# EAGLE board X04B-005-B (EAGLE 6.3)
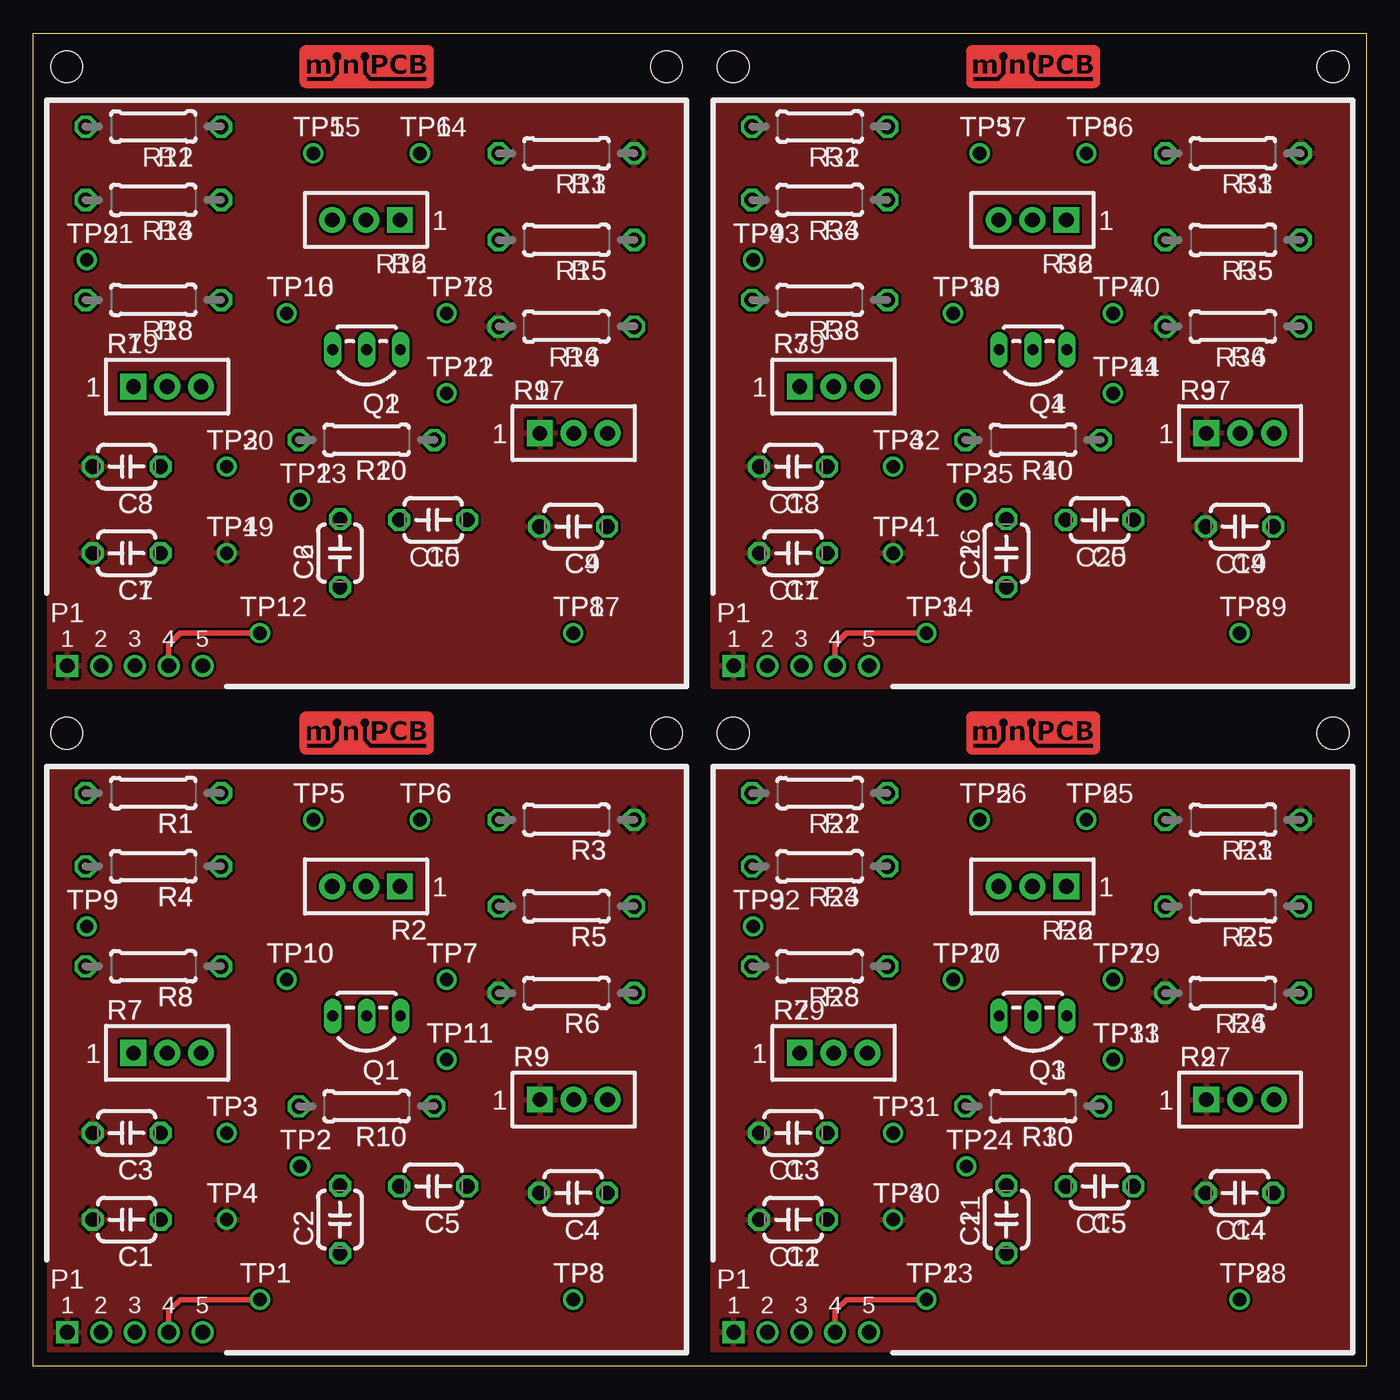
[diagram p0: board, top side]
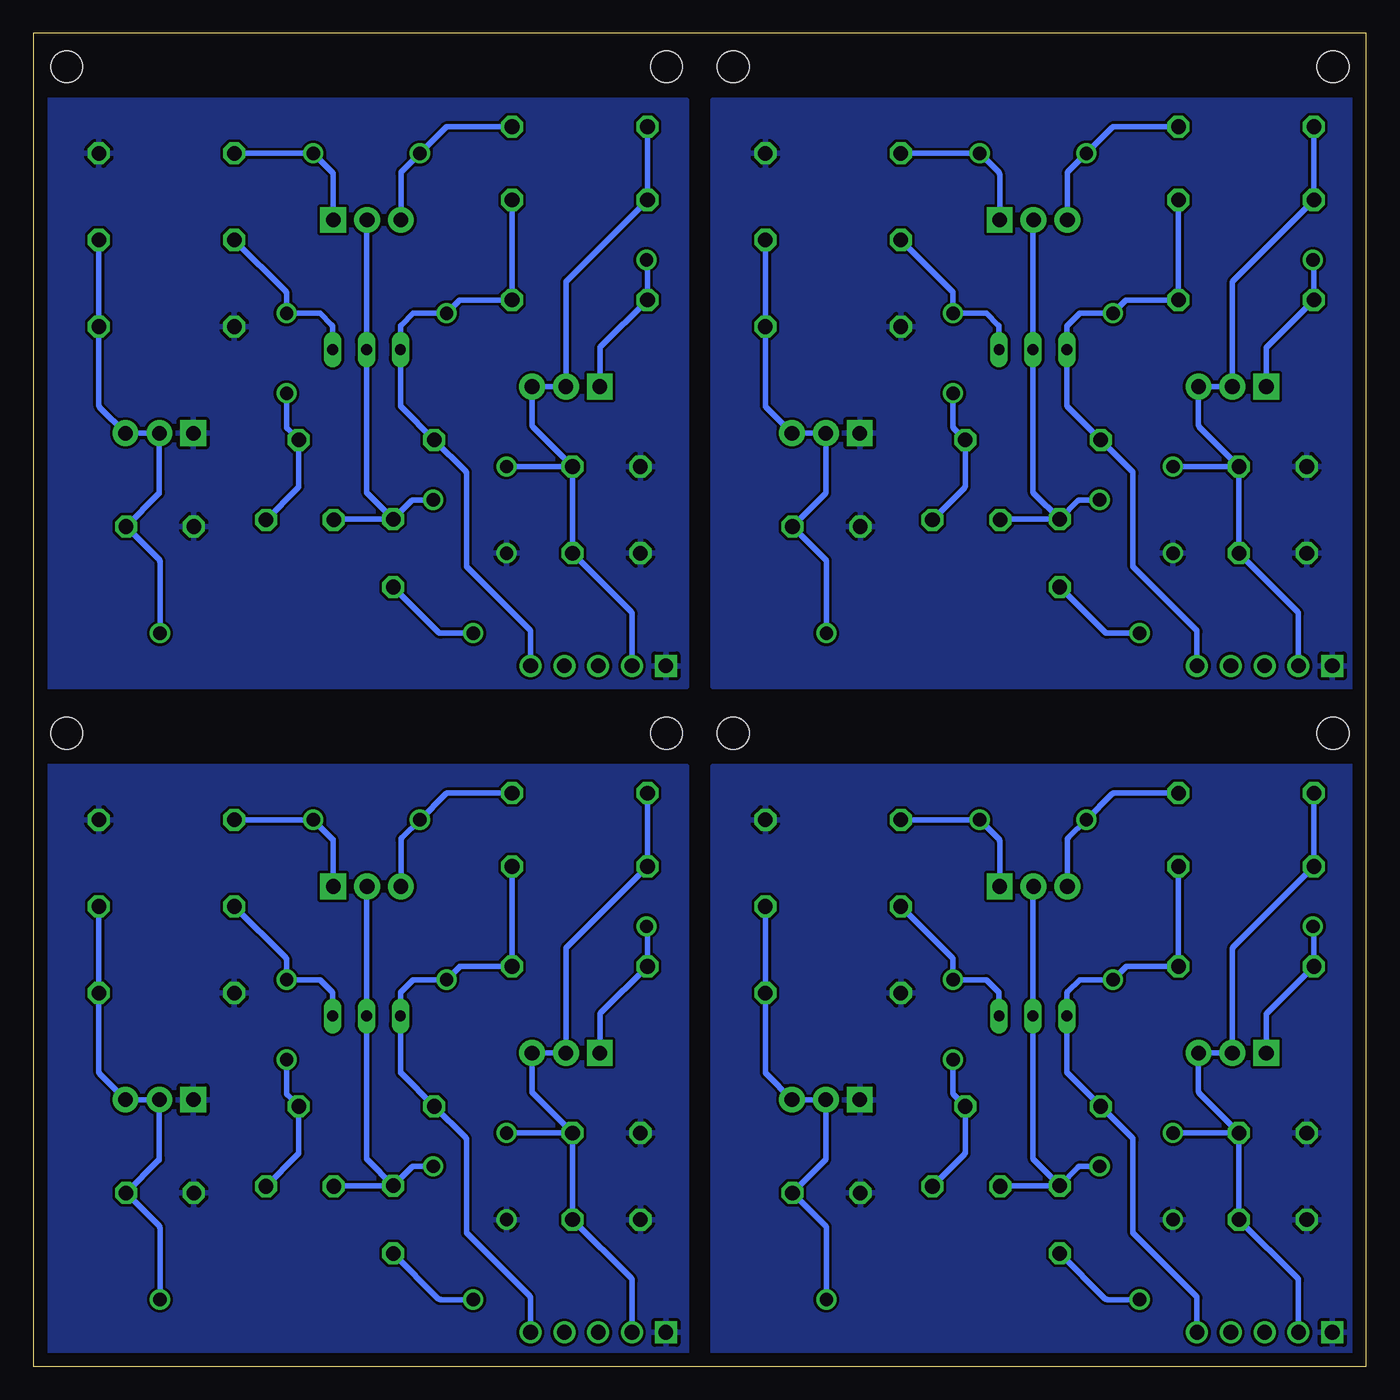
[diagram p1: board, bottom side, seen from below]

Size 100 x 100 mm. Coordinates in mm from the lower left corner, seen from the top.
Outline: 0,0 0,100 100,100 100,0 0,0
Copper layers (1*16): Top 0.035mm / dielectric 1.5mm / Bottom 0.035mm
Design rules "minipcb": minimum track width 10mil, minimum drill 24mil, track to track 8mil, track to pad 8mil, pad to pad 8mil, via to via 8mil, smd to smd 8mil, copper to edge 40mil, drill to drill 8mil, minimum pad ring 10mil, minimum via ring 8mil, stop-mask expansion 4mil, vias tented up to drill 20mil, thermal gap 10mil

## Footprints (pad centres in the part's own frame; a part is rotated, then mirrored left to right if it is on the bottom)
C050-024X044 = drill 1.1 octagon: 1 -2.54,0; 2 2.54,0
MINIPCB_5P_50X50MM = drill 1.1 square: 1 2.54,2.54 | drill 1.1: 2 5.08,2.54; 3 7.62,2.54; 4 10.16,2.54; 5 12.7,2.54 | hole 2.4: 47.5,47.5; 2.5,47.5
TO92-EBC-OVAL@1 = drill 0.813 long: B 0,-1.27; C 2.54,-1.27; E -2.54,-1.27
0207/10 = drill 1.1 octagon: 1 -5.08,0; 2 5.08,0
TRIM_0100 = drill 1.1 pad 1.93 square: 1 0,0 | drill 1.1 pad 1.93: 2 2.54,0; 3 5.08,0
PINS_1_TESTPOINT_KE5000_NOTEXT = drill 1: 1 0,0

## Placement (x,y rotation side)
C1  [C050-024X044]  7,11 180 top
C2  [C050-024X044]  23,11 90 top
C3  [C050-024X044]  7,17.5 180 top
C4  [C050-024X044]  40.5,13 180 top
C5  [C050-024X044]  30,13.5 180 top
C6  [C050-024X044]  23,61 90 top
C7  [C050-024X044]  7,61 180 top
C8  [C050-024X044]  7,67.5 180 top
C9  [C050-024X044]  40.5,63 180 top
C10  [C050-024X044]  30,63.5 180 top
C11  [C050-024X044]  73,11 90 top
C12  [C050-024X044]  57,11 180 top
C13  [C050-024X044]  57,17.5 180 top
C14  [C050-024X044]  90.5,13 180 top
C15  [C050-024X044]  80,13.5 180 top
C16  [C050-024X044]  73,61 90 top
C17  [C050-024X044]  57,61 180 top
C18  [C050-024X044]  57,67.5 180 top
C19  [C050-024X044]  90.5,63 180 top
C20  [C050-024X044]  80,63.5 180 top
E$1  [MINIPCB_PANEL_IMAGEFRAME]  -24.13,-31.75 0 top  (outside the outline)
P1-  [MINIPCB_5P_50X50MM]  0,0 0 top
P1-1  [MINIPCB_5P_50X50MM]  0,50 0 top
P1-2  [MINIPCB_5P_50X50MM]  50,0 0 top
P1-3  [MINIPCB_5P_50X50MM]  50,50 0 top
Q1  [TO92-EBC-OVAL@1]  25,25 180 top
Q2  [TO92-EBC-OVAL@1]  25,75 180 top
Q3  [TO92-EBC-OVAL@1]  75,25 180 top
Q4  [TO92-EBC-OVAL@1]  75,75 180 top
R1  [0207/10]  9,43 180 top
R2  [TRIM_0100]  27.5,36 180 top
R3  [0207/10]  40,41 180 top
R4  [0207/10]  9,37.5 180 top
R5  [0207/10]  40,34.5 180 top
R6  [0207/10]  40,28 0 top
R7  [TRIM_0100]  7.5,23.5 0 top
R8  [0207/10]  9,30 180 top
R9  [TRIM_0100]  38,20 0 top
R10  [0207/10]  25,19.5 180 top
R11  [0207/10]  40,91 180 top
R12  [0207/10]  9,93 180 top
R13  [0207/10]  9,87.5 180 top
R14  [0207/10]  40,78 0 top
R15  [0207/10]  40,84.5 180 top
R16  [TRIM_0100]  27.5,86 180 top
R17  [TRIM_0100]  38,70 0 top
R18  [0207/10]  9,80 180 top
R19  [TRIM_0100]  7.5,73.5 0 top
R20  [0207/10]  25,69.5 180 top
R21  [0207/10]  90,41 180 top
R22  [0207/10]  59,43 180 top
R23  [0207/10]  59,37.5 180 top
R24  [0207/10]  90,28 0 top
R25  [0207/10]  90,34.5 180 top
R26  [TRIM_0100]  77.5,36 180 top
R27  [TRIM_0100]  88,20 0 top
R28  [0207/10]  59,30 180 top
R29  [TRIM_0100]  57.5,23.5 0 top
R30  [0207/10]  75,19.5 180 top
R31  [0207/10]  90,91 180 top
R32  [0207/10]  59,93 180 top
R33  [0207/10]  59,87.5 180 top
R34  [0207/10]  90,78 0 top
R35  [0207/10]  90,84.5 180 top
R36  [TRIM_0100]  77.5,86 180 top
R37  [TRIM_0100]  88,70 0 top
R38  [0207/10]  59,80 180 top
R39  [TRIM_0100]  57.5,73.5 0 top
R40  [0207/10]  75,69.5 180 top
TP1  [PINS_1_TESTPOINT_KE5000_NOTEXT]  17,5 0 top
TP2  [PINS_1_TESTPOINT_KE5000_NOTEXT]  20,15 0 top
TP3  [PINS_1_TESTPOINT_KE5000_NOTEXT]  14.5,17.5 0 top
TP4  [PINS_1_TESTPOINT_KE5000_NOTEXT]  14.5,11 0 top
TP5  [PINS_1_TESTPOINT_KE5000_NOTEXT]  21,41 0 top
TP6  [PINS_1_TESTPOINT_KE5000_NOTEXT]  29,41 0 top
TP7  [PINS_1_TESTPOINT_KE5000_NOTEXT]  31,29 0 top
TP8  [PINS_1_TESTPOINT_KE5000_NOTEXT]  40.5,5 0 top
TP9  [PINS_1_TESTPOINT_KE5000_NOTEXT]  4,33 0 top
TP10  [PINS_1_TESTPOINT_KE5000_NOTEXT]  19,29 0 top
TP11  [PINS_1_TESTPOINT_KE5000_NOTEXT]  31,23 0 top
TP12  [PINS_1_TESTPOINT_KE5000_NOTEXT]  17,55 0 top
TP13  [PINS_1_TESTPOINT_KE5000_NOTEXT]  20,65 0 top
TP14  [PINS_1_TESTPOINT_KE5000_NOTEXT]  29,91 0 top
TP15  [PINS_1_TESTPOINT_KE5000_NOTEXT]  21,91 0 top
TP16  [PINS_1_TESTPOINT_KE5000_NOTEXT]  19,79 0 top
TP17  [PINS_1_TESTPOINT_KE5000_NOTEXT]  40.5,55 0 top
TP18  [PINS_1_TESTPOINT_KE5000_NOTEXT]  31,79 0 top
TP19  [PINS_1_TESTPOINT_KE5000_NOTEXT]  14.5,61 0 top
TP20  [PINS_1_TESTPOINT_KE5000_NOTEXT]  14.5,67.5 0 top
TP21  [PINS_1_TESTPOINT_KE5000_NOTEXT]  4,83 0 top
TP22  [PINS_1_TESTPOINT_KE5000_NOTEXT]  31,73 0 top
TP23  [PINS_1_TESTPOINT_KE5000_NOTEXT]  67,5 0 top
TP24  [PINS_1_TESTPOINT_KE5000_NOTEXT]  70,15 0 top
TP25  [PINS_1_TESTPOINT_KE5000_NOTEXT]  79,41 0 top
TP26  [PINS_1_TESTPOINT_KE5000_NOTEXT]  71,41 0 top
TP27  [PINS_1_TESTPOINT_KE5000_NOTEXT]  69,29 0 top
TP28  [PINS_1_TESTPOINT_KE5000_NOTEXT]  90.5,5 0 top
TP29  [PINS_1_TESTPOINT_KE5000_NOTEXT]  81,29 0 top
TP30  [PINS_1_TESTPOINT_KE5000_NOTEXT]  64.5,11 0 top
TP31  [PINS_1_TESTPOINT_KE5000_NOTEXT]  64.5,17.5 0 top
TP32  [PINS_1_TESTPOINT_KE5000_NOTEXT]  54,33 0 top
TP33  [PINS_1_TESTPOINT_KE5000_NOTEXT]  81,23 0 top
TP34  [PINS_1_TESTPOINT_KE5000_NOTEXT]  67,55 0 top
TP35  [PINS_1_TESTPOINT_KE5000_NOTEXT]  70,65 0 top
TP36  [PINS_1_TESTPOINT_KE5000_NOTEXT]  79,91 0 top
TP37  [PINS_1_TESTPOINT_KE5000_NOTEXT]  71,91 0 top
TP38  [PINS_1_TESTPOINT_KE5000_NOTEXT]  69,79 0 top
TP39  [PINS_1_TESTPOINT_KE5000_NOTEXT]  90.5,55 0 top
TP40  [PINS_1_TESTPOINT_KE5000_NOTEXT]  81,79 0 top
TP41  [PINS_1_TESTPOINT_KE5000_NOTEXT]  64.5,61 0 top
TP42  [PINS_1_TESTPOINT_KE5000_NOTEXT]  64.5,67.5 0 top
TP43  [PINS_1_TESTPOINT_KE5000_NOTEXT]  54,83 0 top
TP44  [PINS_1_TESTPOINT_KE5000_NOTEXT]  81,73 0 top

## Library data of the parts
C1-C20 E$1 Q1-Q4 R1-R40 TP1-TP44 = minipcb
P1- P1-1-P1-3 = minipcb; PART_NUMBER: X04B-005-B; REVISION: A

## Nets
GND: C1.2 C3.2 C4.2 P1-.1 R3.1 R6.1 R9.1 TP4.1
GND1: C7.2 C8.2 C9.2 P1-1.1 R11.1 R14.1 R17.1 TP19.1
GND2: C12.2 C13.2 C14.2 P1-2.1 R21.1 R24.1 R27.1 TP30.1
GND3: C17.2 C18.2 C19.2 P1-3.1 R31.1 R34.1 R37.1 TP41.1
N$1: R7.1 R8.2 TP9.1
N$2: R1.1 R2.3 TP5.1
N$3: R2.1 R3.2 TP6.1
N$4: C4.1 R5.1 R6.2 R9.2 R9.3 TP8.1
N$5: C2.2 C5.2 Q1.B R2.2 TP2.1
N$6: Q1.E R5.2 TP7.1
N$7: R18.2 R19.1 TP21.1
N$8: C5.1 R10.1 TP11.1
N$9: P1-.5 Q1.C R4.1 R8.1 R10.2 TP10.1
N$10: C2.1 P1-.4 TP1.1
N$11: R12.1 R16.3 TP15.1
N$12: R11.2 R16.1 TP14.1
N$13: C9.1 R14.2 R15.1 R17.2 R17.3 TP17.1
N$14: Q2.E R15.2 TP18.1
N$15: C10.1 R20.1 TP22.1
N$16: P1-1.5 Q2.C R13.1 R18.1 R20.2 TP16.1
N$17: C6.1 P1-1.4 TP12.1
N$18: C6.2 C10.2 Q2.B R16.2 TP13.1
N$19: R28.2 R29.1 TP32.1
N$20: R22.1 R26.3 TP26.1
N$21: R21.2 R26.1 TP25.1
N$22: C14.1 R24.2 R25.1 R27.2 R27.3 TP28.1
N$23: Q3.E R25.2 TP29.1
N$24: C15.1 R30.1 TP33.1
N$25: P1-2.5 Q3.C R23.1 R28.1 R30.2 TP27.1
N$26: C11.1 P1-2.4 TP23.1
N$27: C11.2 C15.2 Q3.B R26.2 TP24.1
N$28: R38.2 R39.1 TP43.1
N$29: R32.1 R36.3 TP37.1
N$30: R31.2 R36.1 TP36.1
N$31: C19.1 R34.2 R35.1 R37.2 R37.3 TP39.1
N$32: Q4.E R35.2 TP40.1
N$33: C20.1 R40.1 TP44.1
N$34: P1-3.5 Q4.C R33.1 R38.1 R40.2 TP38.1
N$35: C16.1 P1-3.4 TP34.1
N$36: C16.2 C20.2 Q4.B R36.2 TP35.1
V+: C1.1 C3.1 P1-.2 R1.2 R4.2 R7.2 R7.3 TP3.1
V+1: C7.1 C8.1 P1-1.2 R12.2 R13.2 R19.2 R19.3 TP20.1
V+2: C12.1 C13.1 P1-2.2 R22.2 R23.2 R29.2 R29.3 TP31.1
V+3: C17.1 C18.1 P1-3.2 R32.2 R33.2 R39.2 R39.3 TP42.1

## Tracks (layer width: path | path; a pad name or v marks a point on that pad's centre or on a via)
GND
  pour Bottom: 1,45 49,45 49,1 1,1
  pour Top: 1,45 49,45 49,1 1,1
GND1
  pour Bottom: 1,95 49,95 49,51 1,51
  pour Top: 1,95 49,95 49,51 1,51
GND2
  pour Bottom: 51,45 99,45 99,1 51,1
  pour Top: 51,45 99,45 99,1 51,1
GND3
  pour Bottom: 51,95 99,95 99,51 51,51
  pour Top: 51,95 99,95 99,51 51,51
N$1
  Bottom 0.406: R7.1 7.5,26.32 arc45 7.43,26.49 R8.2 3.92,32.81 arc-45 TP9.1
N$2
  Bottom 0.406: R1.1 18.89,43 arc-45 19.07,42.93 TP5.1 22.35,39.65 arc-45 22.42,39.48 R2.3
N$3
  Bottom 0.406: R2.1 27.5,39.4 arc-45 27.57,39.57 TP6.1 R3.2
N$4
  Bottom 0.406: TP8.1 40.5,10.36 arc-45 40.57,10.53 C4.1 40.61,15.43 arc-45 40.54,15.61 R9.2 R9.3 45.01,21.93 arc45 45.08,22.11 R6.2 R5.1
N$5
  Bottom 0.406: C2.2 24.93,15.47 arc45 25,15.64 Q1.B 25,35.9 arc45 R2.2 | C2.2 21.61,14.93 arc45 21.43,15 TP2.1 | C5.2 arc45 27.36,13.54 C2.2
N$6
  Bottom 0.406: Q1.E 27.54,27.93 arc-45 27.61,28.11 28.5,29 TP7.1 31,30.48 arc-45 31.07,30.65 R5.2
N$7
  Bottom 0.406: R19.1 7.5,76.31 arc45 7.43,76.49 R18.2 3.92,82.81 arc-45 TP21.1
N$8
  Bottom 0.406: C5.1 30.15,15.89 arc-45 30.08,16.07 R10.1 30.93,20.35 arc45 31,20.52 TP11.1
N$9
  Bottom 0.406: R4.1 R8.1 17.89,30 arc-45 18.07,29.93 TP10.1 21.5,29 22.39,28.11 arc-45 22.46,27.93 Q1.C 22.46,22.14 arc-45 22.39,21.97 R10.2 17.57,17.15 arc45 17.5,16.98 17.5,10 12.77,5.27 arc45 12.7,5.09 P1-.5
N$10
  Top 0.406: P1-.4 10.16,4.05 arc-45 10.23,4.23 11,5 TP1.1
  Bottom 0.406: TP1.1 19.43,5 arc45 19.61,5.07 C2.1
N$11
  Bottom 0.406: R12.1 18.89,93 arc-45 19.07,92.93 TP15.1 22.35,89.65 arc-45 22.42,89.47 R16.3
N$12
  Bottom 0.406: R16.1 27.5,89.39 arc-45 27.57,89.57 TP14.1 R11.2
N$13
  Bottom 0.406: TP17.1 40.5,60.35 arc-45 40.57,60.53 C9.1 40.61,65.43 arc-45 40.54,65.61 R17.2 R17.3 45.01,71.93 arc45 45.08,72.11 R14.2 R15.1
N$14
  Bottom 0.406: Q2.E 27.54,77.94 arc-45 27.61,78.11 28.5,79 TP18.1 31,80.47 arc-45 31.07,80.65 R15.2
N$15
  Bottom 0.406: C10.1 30.15,65.89 arc-45 30.08,66.06 R20.1 30.93,70.35 arc45 31,70.53 TP22.1
N$16
  Bottom 0.406: R13.1 R18.1 17.89,80 arc-45 18.07,79.93 TP16.1 21.5,79 22.39,78.11 arc-45 22.46,77.94 Q2.C 22.46,72.14 arc-45 22.39,71.97 R20.2 17.57,67.15 arc45 17.5,66.97 17.5,60 12.77,55.27 arc45 12.7,55.09 P1-1.5
N$17
  Top 0.406: P1-1.4 10.16,54.05 arc-45 10.23,54.23 11,55 TP12.1
  Bottom 0.406: TP12.1 19.43,55 arc45 19.61,55.07 C6.1
N$18
  Bottom 0.406: C6.2 24.93,65.47 arc45 25,65.64 Q2.B 25,85.9 arc45 R16.2 | C6.2 21.61,64.93 arc45 21.43,65 TP13.1 | C10.2 arc45 27.36,63.54 C6.2
N$19
  Bottom 0.406: R29.1 57.5,26.32 arc45 57.43,26.49 R28.2 53.92,32.81 arc-45 TP32.1
N$20
  Bottom 0.406: R22.1 68.89,43 arc-45 69.07,42.93 TP26.1 72.35,39.65 arc-45 72.42,39.48 R26.3
N$21
  Bottom 0.406: R26.1 77.5,39.4 arc-45 77.57,39.57 TP25.1 R21.2
N$22
  Bottom 0.406: TP28.1 90.5,10.36 arc-45 90.57,10.53 C14.1 90.61,15.43 arc-45 90.54,15.61 R27.2 R27.3 95.01,21.93 arc45 95.08,22.11 R24.2 R25.1
N$23
  Bottom 0.406: Q3.E 77.54,27.93 arc-45 77.61,28.11 78.5,29 TP29.1 81,30.48 arc-45 81.07,30.65 R25.2
N$24
  Bottom 0.406: C15.1 80.15,15.89 arc-45 80.08,16.07 R30.1 80.93,20.35 arc45 81,20.52 TP33.1
N$25
  Bottom 0.406: R23.1 R28.1 67.89,30 arc-45 68.07,29.93 TP27.1 71.5,29 72.39,28.11 arc-45 72.46,27.93 Q3.C 72.46,22.14 arc-45 72.39,21.97 R30.2 67.57,17.15 arc45 67.5,16.98 67.5,10 62.77,5.27 arc45 62.7,5.09 P1-2.5
N$26
  Top 0.406: P1-2.4 60.16,4.05 arc-45 60.23,4.23 61,5 TP23.1
  Bottom 0.406: TP23.1 69.44,5 arc45 69.61,5.07 C11.1
N$27
  Bottom 0.406: C11.2 74.93,15.47 arc45 75,15.64 Q3.B 75,35.9 arc45 R26.2 | C11.2 71.61,14.93 arc45 71.44,15 TP24.1 | C15.2 arc45 77.36,13.54 C11.2
N$28
  Bottom 0.406: R39.1 57.5,76.31 arc45 57.43,76.49 R38.2 53.92,82.81 arc-45 TP43.1
N$29
  Bottom 0.406: R32.1 68.89,93 arc-45 69.07,92.93 TP37.1 72.35,89.65 arc-45 72.42,89.47 R36.3
N$30
  Bottom 0.406: R36.1 77.5,89.39 arc-45 77.57,89.57 TP36.1 R31.2
N$31
  Bottom 0.406: TP39.1 90.5,60.35 arc-45 90.57,60.53 C19.1 90.61,65.43 arc-45 90.54,65.61 R37.2 R37.3 95.01,71.93 arc45 95.08,72.11 R34.2 R35.1
N$32
  Bottom 0.406: Q4.E 77.54,77.94 arc-45 77.61,78.11 78.5,79 TP40.1 81,80.47 arc-45 81.07,80.65 R35.2
N$33
  Bottom 0.406: C20.1 80.15,65.89 arc-45 80.08,66.06 R40.1 80.93,70.35 arc45 81,70.53 TP44.1
N$34
  Bottom 0.406: R33.1 R38.1 67.89,80 arc-45 68.07,79.93 TP38.1 71.5,79 72.39,78.11 arc-45 72.46,77.94 Q4.C 72.46,72.14 arc-45 72.39,71.97 R40.2 67.57,67.15 arc45 67.5,66.97 67.5,60 62.77,55.27 arc45 62.7,55.09 P1-3.5
N$35
  Top 0.406: P1-3.4 60.16,54.05 arc-45 60.23,54.23 61,55 TP34.1
  Bottom 0.406: TP34.1 69.44,55 arc45 69.61,55.07 C16.1
N$36
  Bottom 0.406: C16.2 74.93,65.47 arc45 75,65.64 Q4.B 75,85.9 arc45 R36.2 | C16.2 71.61,64.93 arc45 71.44,65 TP35.1 | C20.2 arc45 77.36,63.54 C16.2
V+
  Bottom 0.406: P1-.2 5.08,6.43 arc-45 5.15,6.61 C1.1 C3.1 | TP3.1 C3.1 | C3.1 12.51,20.47 arc45 12.58,20.64 R7.3 R7.2 10.04,31.27 arc45 9.97,31.45 R4.2 R1.2
V+1
  Bottom 0.406: P1-1.2 5.08,56.44 arc-45 5.15,56.61 C7.1 C8.1 | TP20.1 C8.1 | C8.1 12.51,70.47 arc45 12.58,70.64 R19.3 R19.2 10.04,81.28 arc45 9.97,81.45 R13.2 R12.2
V+2
  Bottom 0.406: P1-2.2 55.08,6.43 arc-45 55.15,6.61 C12.1 C13.1 | TP31.1 C13.1 | C13.1 62.51,20.47 arc45 62.58,20.64 R29.3 R29.2 60.04,31.27 arc45 59.97,31.45 R23.2 R22.2
V+3
  Bottom 0.406: P1-3.2 55.08,56.44 arc-45 55.15,56.61 C17.1 C18.1 | TP42.1 C18.1 | C18.1 62.51,70.47 arc45 62.58,70.64 R39.3 R39.2 60.04,81.28 arc45 59.97,81.45 R33.2 R32.2

## Text on the board
_tNames: TP5 | TP6 | TP5 | TP6 | R1 | R1 | R3 | R3 | R4 | R4 | TP9 | R2 | TP9 | R2 | R5 | R5 | TP10 | TP7 | TP10 | TP7 | R8 | R8 | R7 | R6 | R7 | R6 | TP11 | TP11 | Q1 | R9 | Q1 | R9 | TP3 | TP3 | R10 | R10 | TP2 | TP2 | C3 | C3 | TP4 | C5 | TP4 | C5 | C4 | C4 | C1 | C2 | C1 | C2 | TP1 | TP8 | TP1 | TP8 | TP5 | TP6 | TP5 | TP6 | R1 | R1 | R3 | R3 | R4 | R4 | TP9 | R2 | TP9 | R2 | R5 | R5 | TP10 | TP7 | TP10 | TP7 | R8 | R8 | R7 | R6 | R7 | R6 | TP11 | TP11 | Q1 | R9 | Q1 | R9 | TP3 | TP3 | R10 | R10 | TP2 | TP2 | C3 | C3 | TP4 | C5 | TP4 | C5 | C4 | C4 | C1 | C2 | C1 | C2 | TP1 | TP8 | TP1 | TP8